# EAGLE board beechainuino copy (EAGLE 8.3.0)
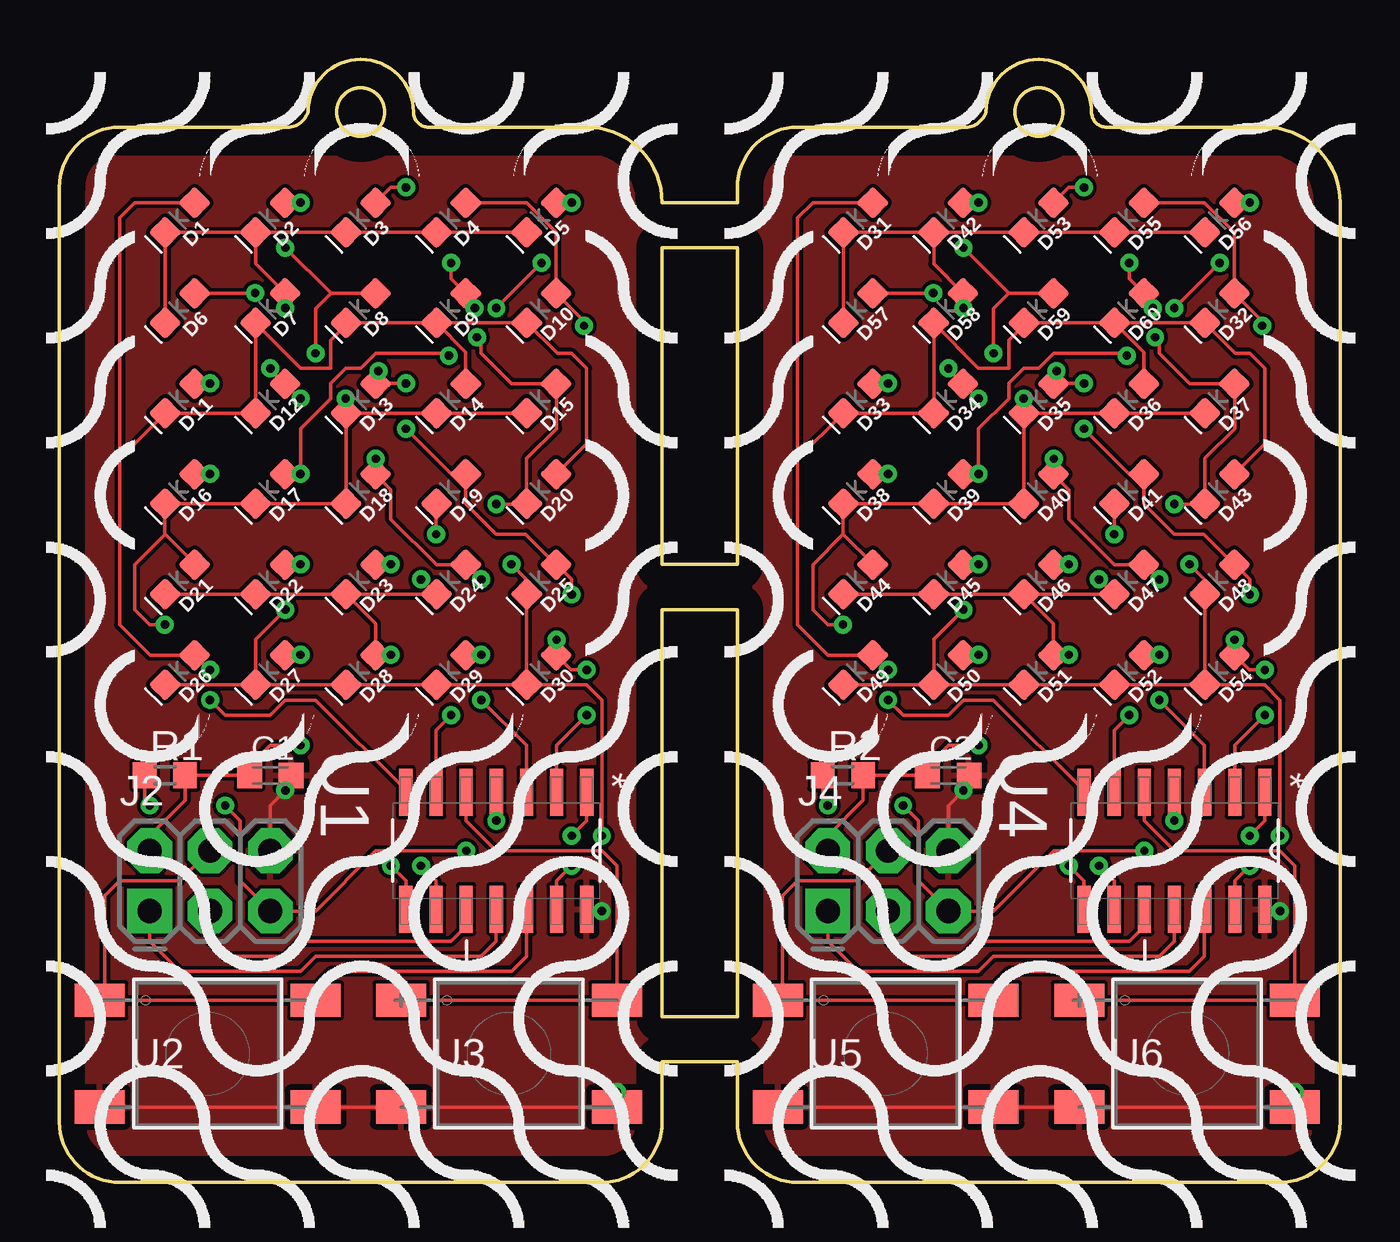
[diagram p0: board, top side]
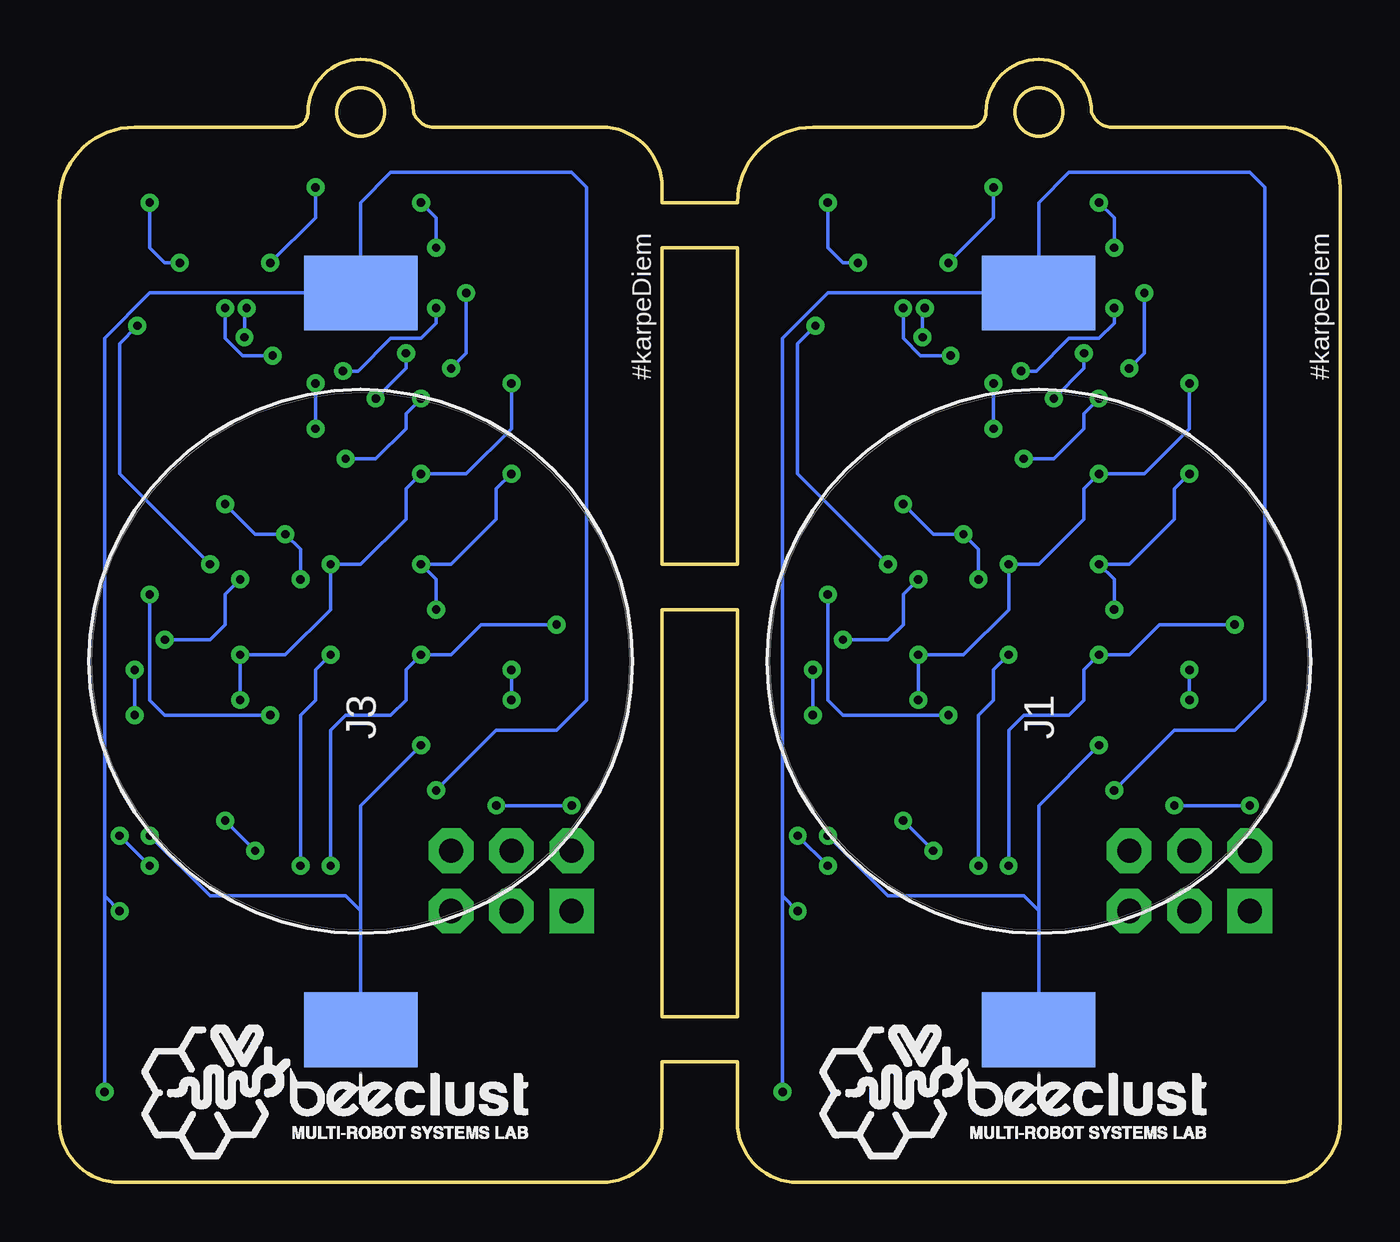
[diagram p1: board, bottom side, seen from below]

Size 53.97 x 47.31 mm. Coordinates in mm from the lower left corner, seen from the top.
Outline: 25.4,39.37 25.4,26.04 28.57,26.04 28.57,39.37 25.4,39.37
Outline: 25.4,24.13 25.4,6.98 28.57,6.98 28.57,24.13 25.4,24.13
Outline: 25.4,5.08 25.4,2.54 arc-90 22.86,0 2.54,0 arc-90 0,2.54 0,41.91 arc-90 2.54,44.45 9.53,44.45 arc77 10.48,45.09 arc-180 14.92,45.09 arc90 15.56,44.45 22.23,44.45 arc-90 25.4,41.27 28.57,41.27 28.57,41.91 arc-90 31.11,44.45 38.1,44.45 arc77 39.05,45.09 arc-180 43.5,45.09 arc90 44.13,44.45 50.8,44.45 arc-90 53.97,41.27 53.97,2.54 arc-90 51.43,0 31.11,0 arc-90 28.57,2.54 28.57,5.08 25.4,5.08
Outline: circle at 12.7,45.09 radius 1
Outline: circle at 41.27,45.09 radius 1
Copper layers (1*16): Top 0.035mm / dielectric 1.5mm / Bottom 0.035mm
Design rules "default": minimum track width 6mil, minimum drill 0.35mm, track to track 6mil, track to pad 6mil, pad to pad 6mil, via to via 6mil, smd to smd 6mil, copper to edge 40mil, drill to drill 6mil, minimum pad ring 10mil, minimum via ring 8mil, stop-mask expansion 4mil, vias tented up to drill 0mil, thermal gap 10mil

## Footprints (pad centres in the part's own frame; a part is rotated, then mirrored left to right if it is on the bottom)
C0603K = smd 1.05 x 1.08: 1 -0.875,0; 2 0.875,0
LED-0603 = smd 1 x 1: A -0.877,0; C 0.877,0
CON2_BATT-HOLDER_SMT = smd 3.15 x 4.775: 1 -31.039,0; 2 0,0
2X3-NS = drill 1.016 pad 1.88 square: 1 -2.54,-1.27 | drill 1.016 pad 1.88 octagon: 2 -2.54,1.27; 3 0,-1.27; 4 0,1.27; 5 2.54,-1.27; 6 2.54,1.27
R0603 = smd 1 x 1.1: 1 -0.85,0; 2 0.85,0
SOIC127P600X175-14N = smd 1.981 x 0.559: 1 -2.464,3.81; 2 -2.464,2.54; 3 -2.464,1.27; 4 -2.464,0; 5 -2.464,-1.27; 6 -2.464,-2.54; 7 -2.464,-3.81; 8 2.464,-3.81; 9 2.464,-2.54; 10 2.464,-1.27; 11 2.464,0; 12 2.464,1.27; 13 2.464,2.54; 14 2.464,3.81
SWITCH_FSM2JSMAA = smd 2.108 x 1.397: 1 -9.093,4.496; 2 -9.093,0; 3 0,0; 4 0,4.496

## Placement (x,y rotation side)
C1  [C0603K]  8.89,17.14 0 top
C2  [C0603K]  37.46,17.14 0 top
D1  RED  [LED-0603]  5.08,40.64 225 top
D2  RED  [LED-0603]  8.89,40.64 225 top
D3  RED  [LED-0603]  12.7,40.64 225 top
D4  RED  [LED-0603]  16.51,40.64 225 top
D5  RED  [LED-0603]  20.32,40.64 225 top
D6  RED  [LED-0603]  5.08,36.83 225 top
D7  RED  [LED-0603]  8.89,36.83 225 top
D8  RED  [LED-0603]  12.7,36.83 225 top
D9  RED  [LED-0603]  16.51,36.83 225 top
D10  RED  [LED-0603]  20.32,36.83 225 top
D11  RED  [LED-0603]  5.08,33.02 225 top
D12  RED  [LED-0603]  8.89,33.02 225 top
D13  RED  [LED-0603]  12.7,33.02 225 top
D14  RED  [LED-0603]  16.51,33.02 225 top
D15  RED  [LED-0603]  20.32,33.02 225 top
D16  RED  [LED-0603]  5.08,29.21 225 top
D17  RED  [LED-0603]  8.89,29.21 225 top
D18  RED  [LED-0603]  12.7,29.21 225 top
D19  RED  [LED-0603]  16.51,29.21 225 top
D20  RED  [LED-0603]  20.32,29.21 225 top
D21  RED  [LED-0603]  5.08,25.4 225 top
D22  RED  [LED-0603]  8.89,25.4 225 top
D23  RED  [LED-0603]  12.7,25.4 225 top
D24  RED  [LED-0603]  16.51,25.4 225 top
D25  RED  [LED-0603]  20.32,25.4 225 top
D26  RED  [LED-0603]  5.08,21.59 225 top
D27  RED  [LED-0603]  8.89,21.59 225 top
D28  RED  [LED-0603]  12.7,21.59 225 top
D29  RED  [LED-0603]  16.51,21.59 225 top
D30  RED  [LED-0603]  20.32,21.59 225 top
D31  RED  [LED-0603]  33.66,40.64 225 top
D32  RED  [LED-0603]  48.89,36.83 225 top
D33  RED  [LED-0603]  33.66,33.02 225 top
D34  RED  [LED-0603]  37.46,33.02 225 top
D35  RED  [LED-0603]  41.27,33.02 225 top
D36  RED  [LED-0603]  45.09,33.02 225 top
D37  RED  [LED-0603]  48.89,33.02 225 top
D38  RED  [LED-0603]  33.66,29.21 225 top
D39  RED  [LED-0603]  37.46,29.21 225 top
D40  RED  [LED-0603]  41.27,29.21 225 top
D41  RED  [LED-0603]  45.09,29.21 225 top
D42  RED  [LED-0603]  37.46,40.64 225 top
D43  RED  [LED-0603]  48.89,29.21 225 top
D44  RED  [LED-0603]  33.66,25.4 225 top
D45  RED  [LED-0603]  37.46,25.4 225 top
D46  RED  [LED-0603]  41.27,25.4 225 top
D47  RED  [LED-0603]  45.09,25.4 225 top
D48  RED  [LED-0603]  48.89,25.4 225 top
D49  RED  [LED-0603]  33.66,21.59 225 top
D50  RED  [LED-0603]  37.46,21.59 225 top
D51  RED  [LED-0603]  41.27,21.59 225 top
D52  RED  [LED-0603]  45.09,21.59 225 top
D53  RED  [LED-0603]  41.27,40.64 225 top
D54  RED  [LED-0603]  48.89,21.59 225 top
D55  RED  [LED-0603]  45.09,40.64 225 top
D56  RED  [LED-0603]  48.89,40.64 225 top
D57  RED  [LED-0603]  33.66,36.83 225 top
D58  RED  [LED-0603]  37.46,36.83 225 top
D59  RED  [LED-0603]  41.27,36.83 225 top
D60  RED  [LED-0603]  45.09,36.83 225 top
J1  796136-1  [CON2_BATT-HOLDER_SMT]  12.7,37.46 90 bottom
J2  AVR_SPI_PRG_6NS  [2X3-NS]  6.35,12.7 0 top
J3  796136-1  [CON2_BATT-HOLDER_SMT]  41.27,37.46 90 bottom
J4  AVR_SPI_PRG_6NS  [2X3-NS]  34.92,12.7 0 top
R1  [R0603]  4.45,17.14 0 top
R2  [R0603]  33.02,17.14 0 top
U1  ATTINY84-20SSU  [SOIC127P600X175-14N]  18.41,13.97 270 top
U2  FSM2JSMATR  [SWITCH_FSM2JSMAA]  10.79,3.17 0 top
U3  FSM2JSMATR  [SWITCH_FSM2JSMAA]  23.49,3.17 0 top
U4  ATTINY84-20SSU  [SOIC127P600X175-14N]  46.99,13.97 270 top
U5  FSM2JSMATR  [SWITCH_FSM2JSMAA]  39.37,3.17 0 top
U6  FSM2JSMATR  [SWITCH_FSM2JSMAA]  52.07,3.17 0 top
U$1  [TRUCHET]  26.03,-1.91 0 top
U$2  [LOGO-M]  22.23,0.63 0 bottom
U$3  [LOGO-M]  50.8,0.63 0 bottom
U$4  [TRUCHET]  54.61,-1.91 0 top

## Library data of the parts
C1 C2 R1 R2 = resistor
D1-D60 = SparkFun-LED; PROD_ID: DIO-00819
J1 J3 = Beeclust; MANUFACTURER_PART_NUMBER: 7961361; VENDOR: TE Connectivity
J2 J4 = SparkFun-Connectors
U1 U4 = Atmel_By_element14_Batch_1-00; MPN: ATTINY84-20SSU; OC_FARNELL: 1636955; OC_NEWARK: 03P2040; PACKAGE: SOIC-14; SUPPLIER: Atmel
U2 U3 U5 U6 = Beeclust; MANUFACTURER_PART_NUMBER: FSM2JSMATR; VENDOR: TE Connectivity
U$1 U$4 = Design
U$2 U$3 = Beeclust

## Nets
0: D1.C D2.C D3.C D4.C D5.C D6.C D7.A D13.A D19.A D25.A U1.6
1: D1.A D7.C D8.C D9.C D10.C D11.C D12.C D14.A D20.A D26.A U1.7
2: D2.A D8.A D13.C D14.C D15.C D16.C D17.C D18.C D21.A D27.A U1.8
3: D3.A D9.A D15.A D19.C D20.C D21.C D22.C D23.C D24.C D28.A U1.9
4: D31.C D35.A D41.A D42.C D48.A D53.C D55.C D56.C D57.C D58.A U4.6
4-SCK: J2.3 U1.10
4-SCK1: J4.3 U4.10
5: D37.A D41.C D43.C D44.C D45.C D46.C D47.C D51.A D53.A D60.A U4.9
5-MISO: J2.1 U1.11
5-MISO1: J4.1 U4.11
6: D33.A D39.A D46.A D52.A D56.A U4.3
6-MOSI: J2.4 U1.12 U2.1 U2.4
6-MOSI1: J4.4 U4.12 U5.1 U5.4
7: D4.A D10.A D16.A D22.A D25.C D26.C D27.C D28.C D29.C D30.C U1.13
8: D34.A D40.A D47.A D54.A D57.A U4.2
8-INT0: U1.5 U3.1 U3.4
8-INT1: U4.5 U6.1 U6.4
9: D5.A D11.A D17.A D23.A D29.A U1.3
10: D6.A D12.A D18.A D24.A D30.A U1.2
11: D32.A D38.A D45.A D48.C D49.C D50.C D51.C D52.C D54.C D55.A U4.13
12: D31.A D32.C D33.C D34.C D36.A D43.A D49.A D58.C D59.C D60.C U4.7
13: D35.C D36.C D37.C D38.C D39.C D40.C D42.A D44.A D50.A D59.A U4.8
GND: C1.2 J1.2 J2.6 U1.14 U2.2 U2.3 U3.2 U3.3
GND1: C2.2 J3.2 J4.6 U4.14 U5.2 U5.3 U6.2 U6.3
RESET: J2.5 R1.1 U1.4
RESET1: J4.5 R2.1 U4.4
VCC: C1.1 J1.1 J2.2 R1.2 U1.1
VCC1: C2.1 J3.1 J4.2 R2.2 U4.1

## Tracks (layer width: path | path; a pad name or v marks a point on that pad's centre or on a via)
0  (via drill 0.35)
  Top 0.152: D2.C D1.C D6.C | D2.C D3.C D4.C D5.C | D2.C 8.27,38.69 D7.A 9.53,37.44 v9.53,36.83 | U1.6 15.88,19.05 v16.51,19.68 | v21.59,24.77 21.59,25.4 20.97,26.02 D25.A 19.66,27.3 18.41,27.3 17.13,28.59 D19.A 16.52,29.83 v14.6,31.75 | v14.6,33.66 D13.A 13.32,34.05 v13.45,34.18
  Bottom 0.152: v16.51,19.68 20.95,19.68 21.59,20.32 v21.59,24.77 | v14.6,31.75 v14.6,33.66 | v13.45,34.18 12.81,34.18 11.43,35.56 10.16,35.56 9.53,36.2 v9.53,36.83
1  (via drill 0.35)
  Top 0.152: 12.17,36.21 D8.C | 12.17,36.21 D9.C | D9.C D10.C 20.98,34.92 21.59,34.92 22.23,34.29 22.23,31.12 D20.A | D9.C 17.13,34.97 D14.A | 2.54,30.48 D11.C D12.C D7.C 8.27,36.18 10.16,34.29 11.43,34.29 11.43,35.48 12.17,36.21 | 2.54,30.48 2.54,23.5 3.82,22.21 D26.A 6.32,21.59 v6.35,21.59 | D1.A 5.69,41.27 3.18,41.27 2.54,40.64 2.54,30.48 | U1.7 14.6,16.51 10.79,20.32 9.53,20.32 8.89,19.68 6.99,19.68 v6.35,20.32
  Bottom 0.152: v6.35,20.32 v6.35,21.59
2  (via drill 0.35)
  Top 0.152: D13.C D14.C D15.C | D13.C D18.C D17.C D16.C 4.45,27.3 | 4.45,27.3 5.7,26.05 D21.A | D2.A v10.16,41.27 | 11.44,37.45 v9.53,39.37 | 11.44,37.45 D8.A | U1.8 14.6,12.7 v13.97,13.34 | D27.A 10.15,22.21 v10.16,22.23 | v4.45,23.5 3.81,23.5 3.18,24.13 3.18,26.02 4.45,27.3 | D13.C 12.08,33.01 v12.06,33.02 | v10.79,34.92 10.79,36.8 11.44,37.45
  Bottom 0.152: v10.16,41.27 9.53,40.64 v9.53,39.37 | v13.97,13.34 13.97,19.05 13.33,19.68 11.43,19.68 10.79,20.32 10.79,21.59 v10.16,22.23 8.89,22.23 7.62,23.5 v4.45,23.5 | v12.06,33.02 10.79,34.29 v10.79,34.92
3  (via drill 0.35)
  Top 0.152: D3.A 13.97,41.91 v14.6,41.91 | v16.51,38.73 16.51,38.07 D9.A 17.51,37.07 v17.51,36.83 | D21.C D22.C D23.C | D23.C D24.C 15.86,24.78 v15.24,25.4 | D23.C 13.32,23.54 13.32,22.27 | 13.32,22.27 D28.A | U1.9 15.88,12.7 v15.24,13.34 | v13.97,22.23 13.37,22.23 13.32,22.27 | v15.88,27.3 D19.C | v18.41,28.58 D20.C 19.7,30.49 20.95,31.75 20.95,33.62 D15.A 19.06,33.64 17.78,34.92 17.78,35.42 v17.6,35.6
  Bottom 0.152: v14.6,41.91 14.6,40.64 v16.51,38.73 | v15.24,13.34 15.24,19.68 14.6,20.32 14.6,21.59 v13.97,22.23 | v15.24,25.4 15.24,26.67 v15.88,27.3 17.15,27.3 v18.41,28.58 | v17.6,35.6 17.6,36.74 v17.51,36.83
4  (via drill 0.35)
  Top 0.152: D42.C D31.C D57.C | D42.C D53.C D55.C D56.C | D42.C 36.84,38.69 D58.A 38.1,37.44 v38.1,36.83 | U4.6 44.45,19.05 v45.09,19.68 | v50.16,24.77 50.16,25.4 49.55,26.02 D48.A 48.23,27.3 46.99,27.3 45.7,28.59 D41.A 45.1,29.83 v43.18,31.75 | v43.18,33.66 41.91,33.66 D35.A 41.89,34.05 v42.02,34.18
  Bottom 0.152: v45.09,19.68 49.53,19.68 50.16,20.32 v50.16,24.77 | v43.18,31.75 v43.18,33.66 | v42.02,34.18 41.39,34.18 40,35.56 38.73,35.56 38.1,36.2 v38.1,36.83
4-SCK
  Top 0.152: J2.3 6.35,10.16 6.99,9.53 9.53,9.53 10.16,10.16 16.51,10.16 17.15,10.79 U1.10
4-SCK1
  Top 0.152: J4.3 34.92,10.16 35.56,9.53 38.1,9.53 38.73,10.16 45.09,10.16 45.72,10.79 U4.10
5  (via drill 0.35)
  Top 0.152: D53.A 42.55,41.91 v43.18,41.91 | v45.09,38.73 45.09,38.07 D60.A 46.08,37.07 v46.08,36.83 | D44.C D45.C D46.C | D46.C D47.C 44.43,24.78 v43.81,25.4 | D46.C 41.89,23.54 41.89,22.27 | 41.89,22.27 D51.A | U4.9 44.45,12.7 v43.81,13.34 | v42.55,22.23 41.94,22.23 41.89,22.27 | v44.45,27.3 44.45,28.58 D41.C | v46.99,28.58 48.26,28.58 D43.C 48.27,30.49 49.53,31.75 49.53,33.62 D37.A 47.64,33.64 46.35,34.92 46.35,35.42 v46.17,35.6
  Bottom 0.152: v43.18,41.91 43.18,40.64 v45.09,38.73 | v43.81,13.34 43.81,19.68 43.18,20.32 43.18,21.59 v42.55,22.23 | v43.81,25.4 43.81,26.67 v44.45,27.3 45.72,27.3 v46.99,28.58 | v46.17,35.6 46.17,36.74 v46.08,36.83
5-MISO
  Top 0.152: J2.1 3.81,10.16 5.08,8.89 10.16,8.89 10.79,9.53 17.78,9.53 18.41,10.16 U1.11
5-MISO1
  Top 0.152: J4.1 32.38,10.16 33.66,8.89 38.73,8.89 39.37,9.53 46.35,9.53 46.99,10.16 U4.11
6  (via drill 0.35)
  Top 0.152: U4.3 48.26,18.41 v46.35,20.32 | v46.35,22.23 45.72,22.23 D52.A | v42.55,26.04 41.91,26.04 D46.A | D39.A 38.1,29.84 v38.73,29.84 38.73,31.75 40,33.02 40,33.66 40.64,34.29 41.27,34.29 41.91,34.92 44.89,34.92 v44.99,34.83 | v34.92,33.66 34.29,33.66 D33.A | v46.99,36.83 v48.89,38.73 | v50.16,41.27 49.53,41.27 D56.A
  Bottom 0.152: v46.35,20.32 v46.35,22.23 44.45,22.23 42.55,24.13 v42.55,26.04 41.27,26.04 39.37,27.94 39.37,29.21 v38.73,29.84 36.83,29.84 34.92,31.75 v34.92,33.66 | v48.89,38.73 49.53,38.73 50.16,39.37 v50.16,41.27 | v44.99,34.83 46.26,34.83 46.99,35.56 v46.99,36.83
6-MOSI
  Top 0.152: 10.75,7.67 U2.1 1.9,7.87 1.9,12.07 2.54,12.7 5.08,12.7 J2.4 | 10.75,7.67 U2.4 | U1.12 19.69,9.53 19.05,8.89 11.43,8.89 10.79,8.25 10.79,7.71 10.75,7.67
6-MOSI1
  Top 0.152: 39.33,7.67 U5.1 30.48,7.87 30.48,12.07 31.11,12.7 33.66,12.7 J4.4 | 39.33,7.67 U5.4 | U4.12 48.26,9.53 47.62,8.89 40,8.89 39.37,8.25 39.37,7.71 39.33,7.67
7  (via drill 0.35)
  Top 0.152: D26.C D27.C | D27.C D28.C D29.C D30.C | D30.C D25.C 19.7,25.38 v19.05,26.04 | D4.A 19.69,41.27 20.95,40.01 20.94,39.99 D10.A 22.11,36.28 v22.11,36.08 | U1.13 20.95,12.7 v21.59,13.34 | v22.86,14.61 22.86,20.32 22.23,20.95 19.72,20.95 D30.C | D27.C 8.27,22.88 v9.53,24.13 | v10.16,26.04 D22.A | v6.35,29.84 D16.A
  Bottom 0.152: v21.59,13.34 v22.86,14.61 | v9.53,24.13 9.53,25.4 v10.16,26.04 8.89,26.04 6.99,27.94 6.99,29.21 v6.35,29.84 | v22.11,36.08 22.86,35.34 22.86,29.84 v19.05,26.04
8  (via drill 0.35)
  Top 0.152: D57.A 36.81,37.45 v36.83,37.46 | D34.A 38.1,33.66 | U4.2 49.53,18.41 v50.8,19.68 | v50.8,21.59 50.13,21.59 D54.A 49.52,22.84 v49.53,22.86 | v46.35,25.4 46.32,25.4 D47.A 44.46,26.02 42.55,27.94 42.55,29.18 D40.A v41.89,30.46 v41.91,30.48 | v38.73,33.02 38.7,33.02 D34.A | v37.46,34.29 37.46,34.26 D34.A
  Bottom 0.152: v50.8,19.68 v50.8,21.59 | v49.53,22.86 47.62,22.86 46.99,23.5 46.99,24.77 v46.35,25.4 | v41.91,30.48 40.64,30.48 39.37,31.75 39.37,32.38 v38.73,33.02 | v37.46,34.29 36.83,34.92 v36.83,37.46
8-INT0
  Top 0.152: U3.1 U3.4 23.49,13.34 22.86,13.97 18.41,13.97 17.15,15.24 U1.5
8-INT1
  Top 0.152: U6.1 U6.4 52.07,13.34 51.43,13.97 46.99,13.97 45.72,15.24 U4.5
9  (via drill 0.35)
  Top 0.152: U1.3 19.69,18.41 v17.78,20.32 | v17.78,22.23 D29.A | v13.97,26.04 D23.A | D17.A v10.16,29.84 10.16,31.75 11.43,33.02 11.43,33.66 12.06,34.29 12.7,34.29 13.33,34.92 16.32,34.92 v16.41,34.83 | v6.35,33.66 D11.A | v18.41,36.83 v20.32,38.73 | v21.59,41.27 D5.A
  Bottom 0.152: v17.78,20.32 v17.78,22.23 15.88,22.23 13.97,24.13 v13.97,26.04 12.7,26.04 10.79,27.94 10.79,29.21 v10.16,29.84 8.26,29.84 6.35,31.75 v6.35,33.66 | v20.32,38.73 20.95,38.73 21.59,39.37 v21.59,41.27 | v16.41,34.83 17.68,34.83 18.41,35.56 v18.41,36.83
10  (via drill 0.35)
  Top 0.152: D6.A 8.24,37.45 v8.26,37.46 | D12.A | U1.2 20.95,18.41 v22.23,19.68 | v22.23,21.59 21.56,21.59 D30.A 20.94,22.84 v20.95,22.86 | v17.78,25.4 17.75,25.4 D24.A 15.89,26.02 13.97,27.94 13.97,29.18 D18.A 13.32,30.46 v13.33,30.48 | v10.16,33.02 10.13,33.02 D12.A | v8.89,34.29 8.89,34.26 D12.A
  Bottom 0.152: v22.23,19.68 v22.23,21.59 | v20.95,22.86 19.05,22.86 18.41,23.5 18.41,24.77 v17.78,25.4 | v13.33,30.48 12.06,30.48 10.79,31.75 10.79,32.38 v10.16,33.02 | v8.89,34.29 8.26,34.92 v8.26,37.46
11  (via drill 0.35)
  Top 0.152: D49.C D50.C | D50.C D51.C D52.C D54.C | D54.C D48.C 48.27,25.38 v47.62,26.04 | D55.A 45.72,41.27 48.26,41.27 49.53,40.01 49.52,39.99 D32.A 50.69,36.28 v50.69,36.08 | U4.13 49.53,12.7 v50.16,13.34 | v51.43,14.61 51.43,20.32 50.8,20.95 48.29,20.95 D54.C | D50.C 36.84,22.88 v38.1,24.13 | v38.73,26.04 38.1,26.04 D45.A | v34.92,29.84 34.29,29.84 D38.A
  Bottom 0.152: v50.16,13.34 v51.43,14.61 | v38.1,24.13 38.1,25.4 v38.73,26.04 37.46,26.04 35.56,27.94 35.56,29.21 v34.92,29.84 | v50.69,36.08 51.43,35.34 51.43,29.84 v47.62,26.04
12  (via drill 0.35)
  Top 0.152: 40.74,36.21 D59.C | 40.74,36.21 D60.C | D60.C D32.C 49.56,34.92 50.16,34.92 50.8,34.29 50.8,31.12 D43.A | D60.C 45.7,34.97 D36.A | 31.11,30.48 D33.C D34.C D58.C 36.84,36.18 38.73,34.29 40,34.29 40,35.48 40.74,36.21 | 31.11,30.48 31.11,23.5 32.4,22.21 D49.A 34.89,21.59 v34.92,21.59 | D31.A 34.26,41.27 31.75,41.27 31.11,40.64 31.11,30.48 | U4.7 43.18,16.51 39.37,20.32 38.1,20.32 37.46,19.68 35.56,19.68 v34.92,20.32
  Bottom 0.152: v34.92,20.32 v34.92,21.59
13  (via drill 0.35)
  Top 0.152: D35.C D36.C D37.C | D35.C D40.C D39.C D38.C 33.02,28.58 33.02,27.3 33.03,27.3 | 33.03,27.3 34.27,26.05 D44.A | D42.A 38.1,41.27 v38.73,41.27 | 40.02,37.45 v38.1,39.37 | 40.02,37.45 D59.A | U4.8 43.18,12.7 v42.55,13.34 | D50.A 38.72,22.21 v38.73,22.23 | v33.02,23.5 32.38,23.5 31.75,24.13 31.75,26.02 33.03,27.3 | D35.C 40.66,33.01 v40.64,33.02 | v39.37,34.92 39.37,36.8 40.02,37.45
  Bottom 0.152: v38.73,41.27 38.1,40.64 v38.1,39.37 | v42.55,13.34 42.55,19.05 41.91,19.68 40,19.68 39.37,20.32 39.37,21.59 v38.73,22.23 37.46,22.23 36.2,23.5 v33.02,23.5 | v40.64,33.02 39.37,34.29 v39.37,34.92
GND  (via drill 0.35)
  Top 0.152: U2.2 U2.3 U3.2 U3.3 v23.49,3.81 | C1.2 9.76,16.75 v9.53,16.51 8.89,15.88 J2.6 | v22.86,11.43 22.3,11.43 U1.14
  Bottom 0.152: v9.53,16.51 6.99,19.05 4.45,19.05 3.18,20.32 3.18,41.91 3.81,42.55 11.43,42.55 12.7,41.27 J1.2 21.59,37.46 23.49,35.56 23.49,14.61 | 23.49,14.61 23.49,12.07 v22.86,11.43 | 23.49,14.61 v23.49,3.81
  pour Top: -0.63,-0.64 -0.63,43.18 26.03,43.18 26.03,-0.64
GND1  (via drill 0.35)
  Top 0.152: U5.2 U5.3 U6.2 U6.3 v52.07,3.81 | C2.2 38.34,16.75 v38.1,16.51 37.46,15.88 J4.6 | v51.43,11.43 50.88,11.43 U4.14
  Bottom 0.152: v38.1,16.51 35.56,19.05 33.02,19.05 31.75,20.32 31.75,41.91 32.38,42.55 40,42.55 41.27,41.27 J3.2 50.16,37.46 52.07,35.56 52.07,14.61 | 52.07,14.61 52.07,12.07 v51.43,11.43 | 52.07,14.61 v52.07,3.81
  pour Top: 27.94,-0.64 27.94,43.18 54.61,43.18 54.61,-0.64
RESET  (via drill 0.35)
  Top 0.152: v17.15,13.97 13.33,13.97 10.79,11.43 J2.5 7.62,12.7 7.62,15.24 v6.99,15.88 | v18.41,15.24 U1.4 | R1.1 3.6,16.09 v3.81,15.88
  Bottom 0.152: v17.15,13.97 v18.41,15.24 | v6.99,15.88 v3.81,15.88
RESET1  (via drill 0.35)
  Top 0.152: v45.72,13.97 41.91,13.97 39.37,11.43 J4.5 36.2,12.7 36.2,15.24 v35.56,15.88 | v46.99,15.24 U4.4 | R2.1 32.17,16.09 v32.38,15.88
  Bottom 0.152: v45.72,13.97 v46.99,15.24 | v35.56,15.88 v32.38,15.88
VCC  (via drill 0.35)
  Top 0.152: v10.16,18.41 8.89,18.41 8.26,17.78 8.26,17.38 C1.1 R1.2 5.29,16.09 3.81,14.61 J2.2 | U1.1 22.23,15.24 v21.59,14.61
  Bottom 0.152: 12.7,11.43 J1.1 | 12.7,11.43 12.7,15.88 v10.16,18.41 | v21.59,14.61 19.05,12.07 13.33,12.07 12.7,11.43
VCC1  (via drill 0.35)
  Top 0.152: v38.73,18.41 37.46,18.41 36.83,17.78 36.83,17.38 C2.1 R2.2 33.87,16.09 32.38,14.61 J4.2 | U4.1 50.8,15.24 v50.16,14.61
  Bottom 0.152: 41.27,11.43 J3.1 | 41.27,11.43 41.27,15.88 v38.73,18.41 | v50.16,14.61 47.62,12.07 41.91,12.07 41.27,11.43

## Text on the board
bPlace: #karpeDiem | #karpeDiem